# Allegro board Base-ventilator-v1.brd
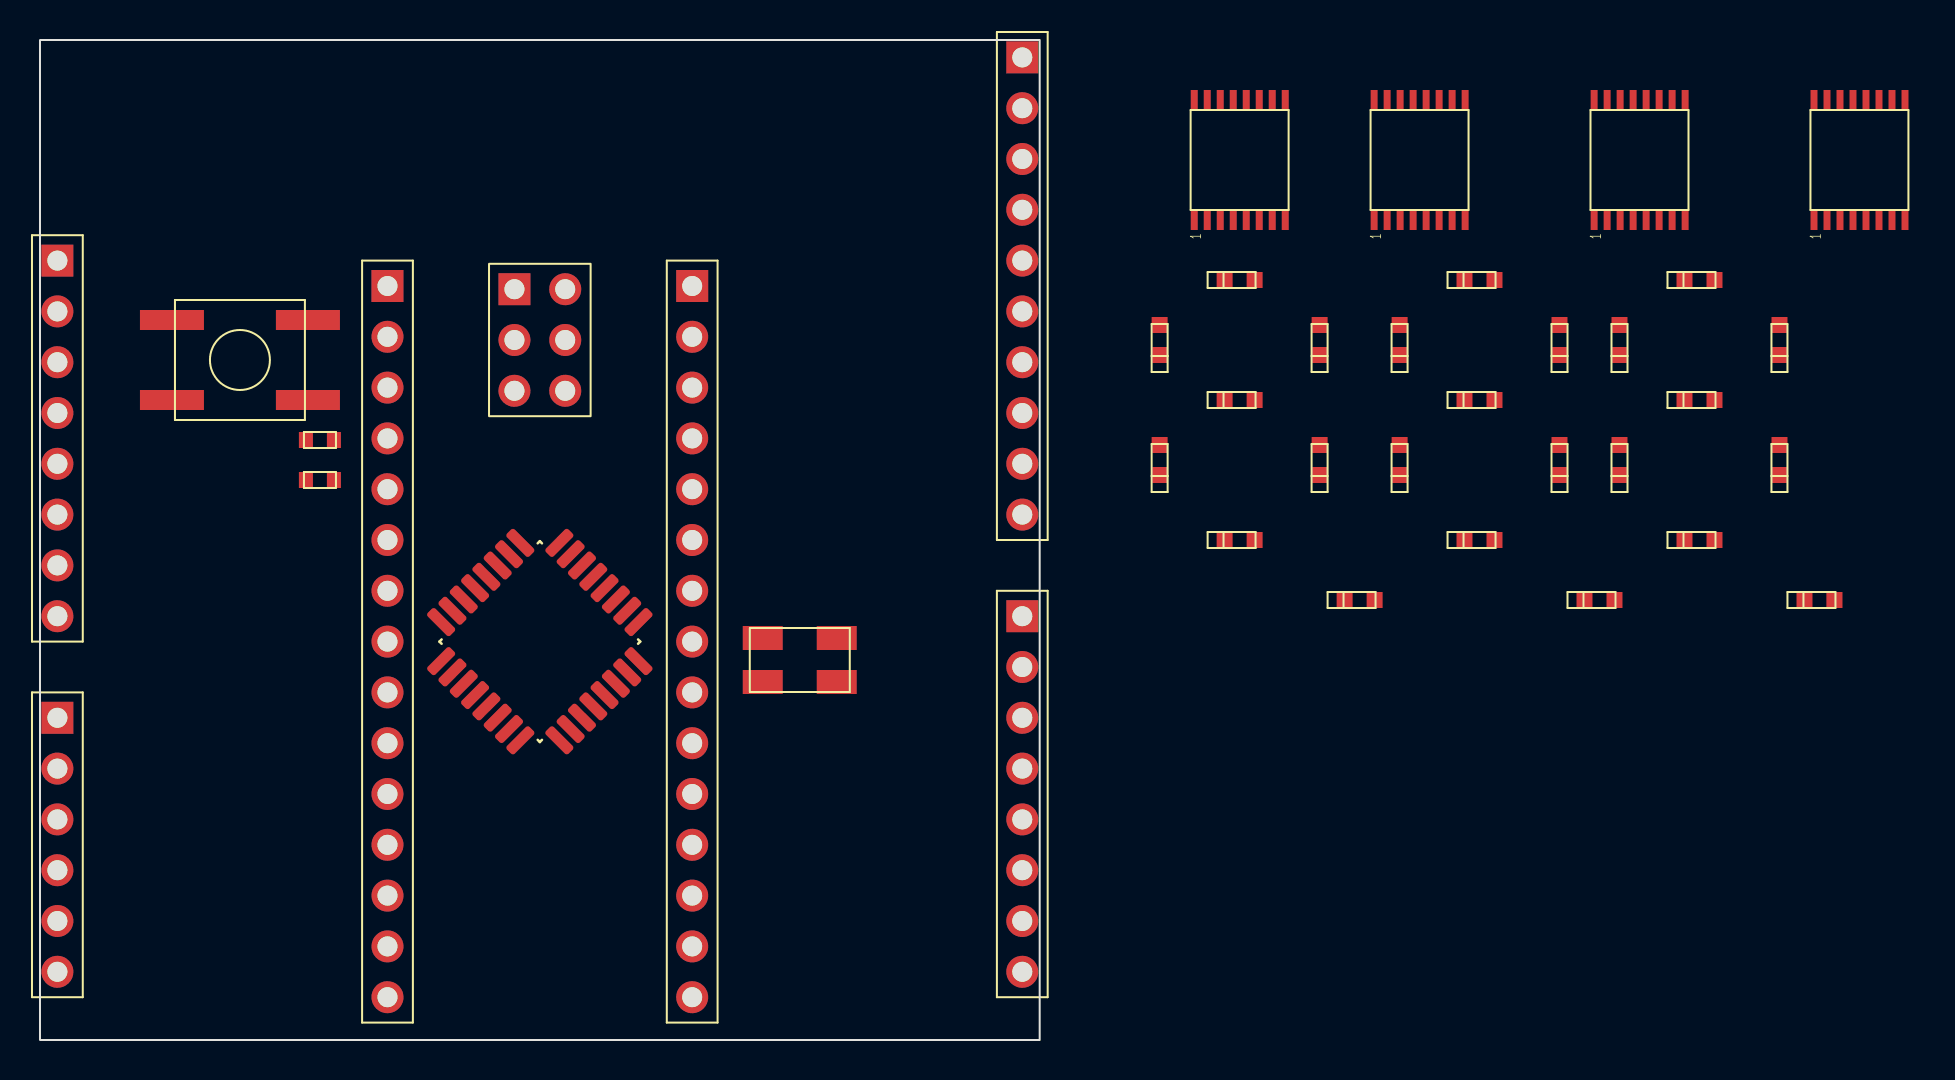
[diagram p0: board, top side]
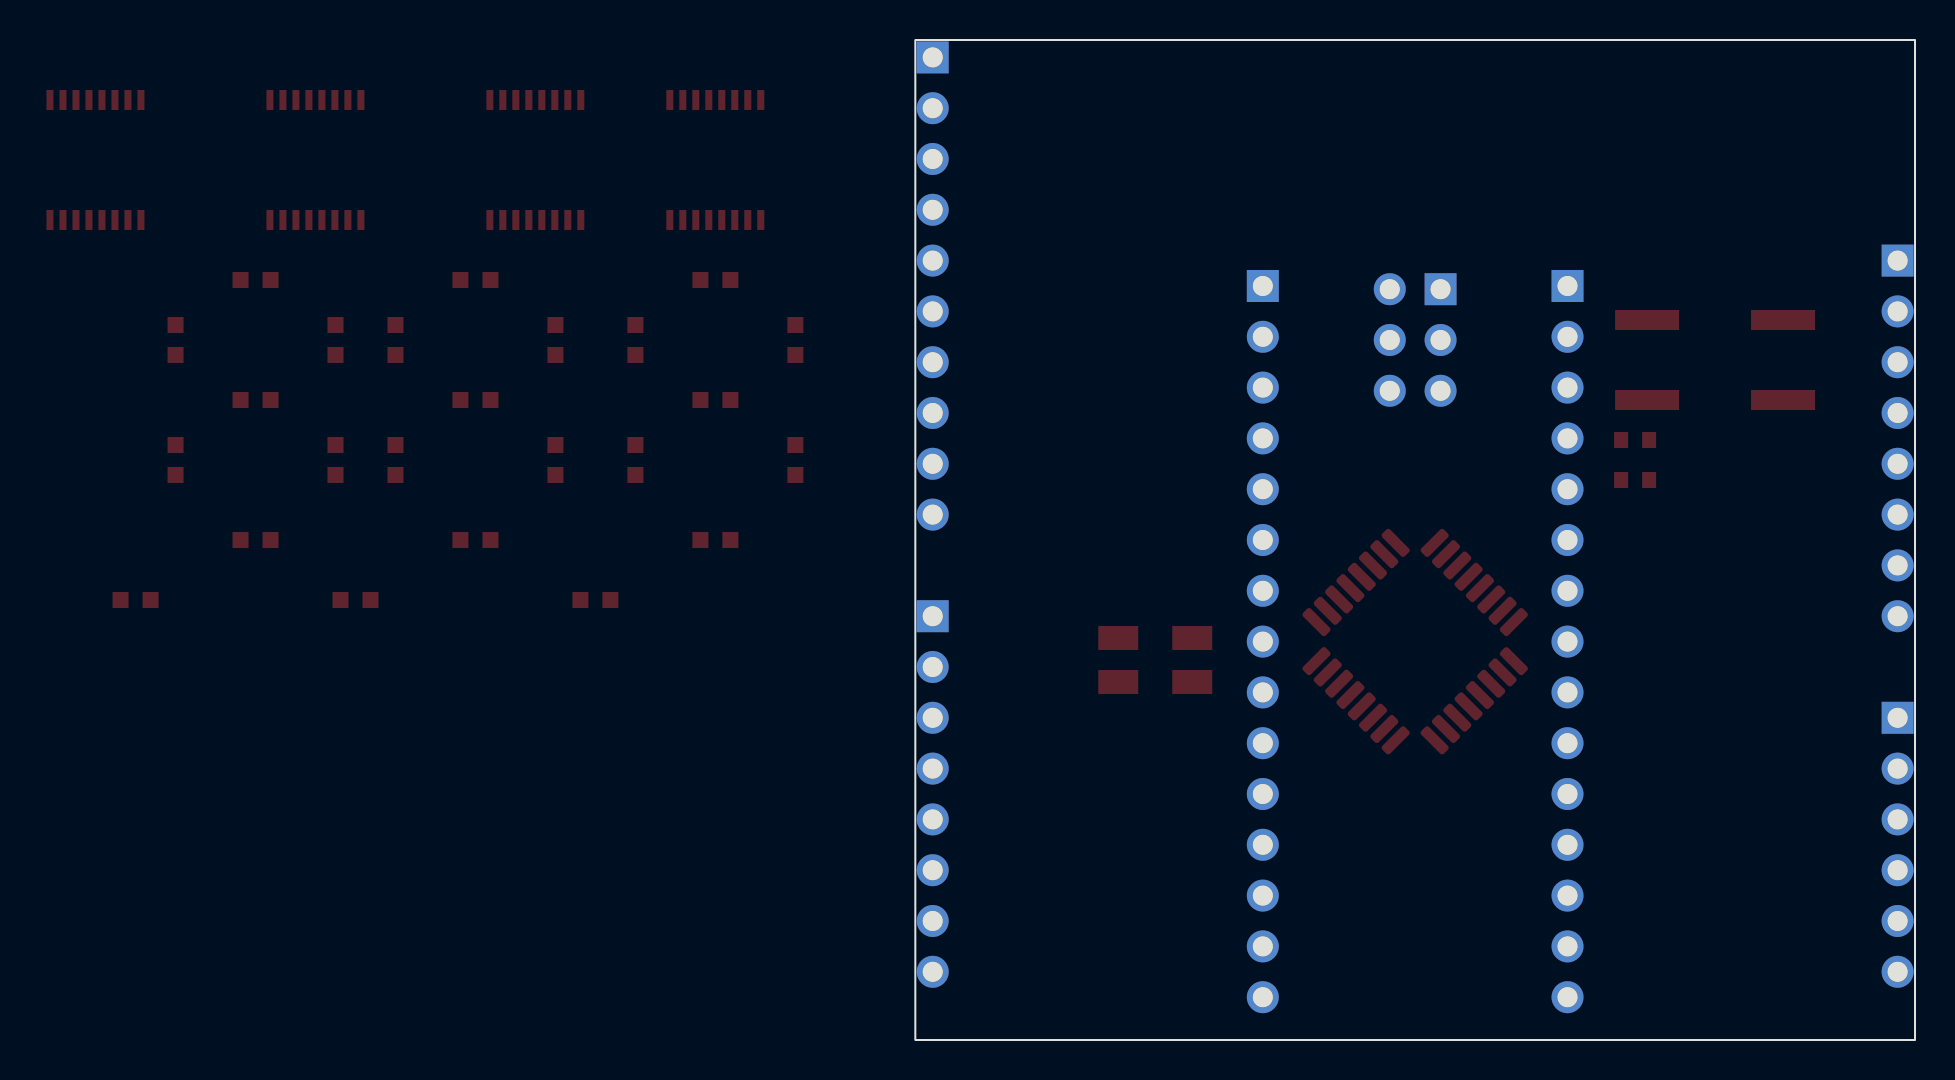
[diagram p1: board, bottom side, seen from below]

Outline 50 x 50 mm; copper layers: TOP, BOTTOM. Coordinates in mm from the lower left corner of the outline.
Outline path: rectangle 0,0 50,50

## Design rules (mm)
constraint set DEFAULT: min track width 0.3

## Placement (name value [footprint] x y rotation side)
C10  0.1uF  [0603M1608]  14 28 0 top
D6  LED GREEN  [LED_0603M1608]  60 38 0 top
D7  LED GREEN  [LED_0603M1608]  64 35 90 top
D10  LED GREEN  [LED_0603M1608]  64 29 90 top
D12  LED GREEN  [LED_0603M1608]  60 25 0 top
D14  LED GREEN  [LED_0603M1608]  56 29 90 top
D16  LED GREEN  [LED_0603M1608]  56 35 90 top
D18  LED GREEN  [LED_0603M1608]  60 32 0 top
D20  LED GREEN  [LED_0603M1608]  66 22 0 top
D22  LED GREEN  [LED_0603M1608]  72 38 0 top
D23  LED GREEN  [LED_0603M1608]  76 35 90 top
D24  LED GREEN  [LED_0603M1608]  76 29 90 top
D25  LED GREEN  [LED_0603M1608]  72 25 0 top
D26  LED GREEN  [LED_0603M1608]  68 29 90 top
D27  LED GREEN  [LED_0603M1608]  68 35 90 top
D28  LED GREEN  [LED_0603M1608]  72 32 0 top
D29  LED GREEN  [LED_0603M1608]  78 22 0 top
D30  LED GREEN  [LED_0603M1608]  83 38 0 top
D31  LED GREEN  [LED_0603M1608]  87 35 90 top
D32  LED GREEN  [LED_0603M1608]  87 29 90 top
D33  LED GREEN  [LED_0603M1608]  83 25 0 top
D34  LED GREEN  [LED_0603M1608]  79 29 90 top
D35  LED GREEN  [LED_0603M1608]  79 35 90 top
D36  LED GREEN  [LED_0603M1608]  83 32 0 top
D37  LED GREEN  [LED_0603M1608]  89 22 0 top
J13  HEADER 15  [HEAD15T25]  17.38 19.92 0 top
J14  HEADER 15  [HEAD15T25]  32.62 19.92 0 top
J15  HEADER 8  [HEAD8T25]  0.87 30.08 0 top
J16  HEADER 10  [HEAD10T25]  49.13 37.7 0 top
J17  HEADER 6  [HEAD6T25]  0.87 9.76 0 top
J18  HEADER 8  [HEAD8T25]  49.13 12.3 0 top
J19  HEADER 3X2  [HEAD2X3T25]  25 35 0 top
R13  10K  [0603M1608]  14 30 0 top
SW1  PB-NO  [BUTTON_EVQQ2]  10 34 270 top
U3  ATMEGA328P-AUR  [QFP80P900X900X120-32N]  25 19.92 135 top
U4  74HC595  [TSSOP16]  60 44 90 top
U5  74HC595  [TSSOP16]  91 44 90 top
U6  74HC595  [TSSOP16]  69 44 90 top
U7  74HC595  [TSSOP16]  80 44 90 top
Y4  16MHz  [CRYSTAL_SMD_50_32]  38 19 90 top

## Library data of the parts
C10 = CAP NP
D6 D7 D10 D12 D14 D16 D18 D20 D22-D37 = LED
J13 J14 = HEADER 15
J15 J18 = HEADER 8
J16 = HEADER 10
J17 = HEADER 6
J19 = HEADER 3X2
R13 = RESISTOR
SW1 = SW_TC_SPST
U3 = ATMEGA328P-AUR
U4-U7 = 74HC595
Y4 = CRYSTAL1-4/SM

## Footprints (pads in the part's own frame, mm; a bottom-side part is the same pattern mirrored in y, then rotated)
0603M1608
  rect 0.7x0.8 smd: 1(-0.7,0) 2(0.7,0)
BUTTON_EVQQ2
  rect 1x3.2 smd: 1(-2,3.4) 2(-2,-3.4) 3(2,-3.4) 4(2,3.4)
CRYSTAL_SMD_50_32
  rect 1.2x2 smd: 1(-1.1,1.85) 2(-1.1,-1.85) 3(1.1,-1.85) 4(1.1,1.85)
HEAD2X3T25
  rect 1.6x1.6 hole 1: 1(-1.27,2.54)
  round 1.6 hole 1: 2(1.27,2.54) 3(-1.27,0) 4(1.27,0) 5(-1.27,-2.54) 6(1.27,-2.54)
HEAD6T25
  rect 1.6x1.6 hole 1: 1(0,6.35)
  round 1.6 hole 1: 2(0,3.81) 3(0,1.27) 4(0,-1.27) 5(0,-3.81) 6(0,-6.35)
HEAD8T25
  rect 1.6x1.6 hole 1: 1(0,8.89)
  round 1.6 hole 1: 2(0,6.35) 3(0,3.81) 4(0,1.27) 5(0,-1.27) 6(0,-3.81) 7(0,-6.35) 8(0,-8.89)
HEAD10T25
  rect 1.6x1.6 hole 1: 1(0,11.43)
  round 1.6 hole 1: 2(0,8.89) 3(0,6.35) 4(0,3.81) 5(0,1.27) 6(0,-1.27) 7(0,-3.81) 8(0,-6.35) 9(0,-8.89) 10(0,-11.43)
HEAD15T25
  rect 1.6x1.6 hole 1: 1(0,17.78)
  round 1.6 hole 1: 2(0,15.24) 3(0,12.7) 4(0,10.16) 5(0,7.62) 6(0,5.08) 7(0,2.54) 8(0,0) 9(0,-2.54) 10(0,-5.08) 11(0,-7.62) 12(0,-10.16) 13(0,-12.7) 14(0,-15.24) 15(0,-17.78)
LED_0603M1608
  rect 0.8x0.8 smd: 1(-0.75,0) 2(0.75,0)
QFP80P900X900X120-32N
  custom 1.6x0.55 smd: 1(-4.18,2.8) 2(-4.18,2) 3(-4.18,1.2) 4(-4.18,0.4) 5(-4.18,-0.4) 6(-4.18,-1.2) 7(-4.18,-2) 8(-4.18,-2.8) 17(4.18,-2.8) 18(4.18,-2) 19(4.18,-1.2) 20(4.18,-0.4) 21(4.18,0.4) 22(4.18,1.2) 23(4.18,2) 24(4.18,2.8)
  custom 0.55x1.6 smd: 9(-2.8,-4.18) 10(-2,-4.18) 11(-1.2,-4.18) 12(-0.4,-4.18) 13(0.4,-4.18) 14(1.2,-4.18) 15(2,-4.18) 16(2.8,-4.18) 25(2.8,4.18) 26(2,4.18) 27(1.2,4.18) 28(0.4,4.18) 29(-0.4,4.18) 30(-1.2,4.18) 31(-2,4.18) 32(-2.8,4.18)
TSSOP16
  rect 1x0.35 smd: 1(-3,2.27) 2(-3,1.62) 3(-3,0.97) 4(-3,0.32) 5(-3,-0.33) 6(-3,-0.98) 7(-3,-1.63) 8(-3,-2.28) 9(3,-2.28) 10(3,-1.63) 11(3,-0.98) 12(3,-0.33) 13(3,0.32) 14(3,0.97) 15(3,1.62) 16(3,2.27)

## Nets
3V: R13.2
3V3: U3.18 U3.20
3V3-AR: J13.2 J15.4
5V: J19.2 U3.4 U3.6(VCC__1) U4.10 U4.16(VCC) U5.10 U5.16(VCC) U6.10 U6.16(VCC) U7.10 U7.16(VCC)
5V-AR: J13.12 J15.5
GND_POWER: C10.2 J13.14 J14.12 J15.6 J15.7 J16.4 J19.6 SW1.1 SW1.2 U3.3 U3.5 U3.21 U4.8 U4.13 U5.8 U5.13 U6.8 U6.13 U7.8 U7.13 Y4.2 Y4.3
VIN: J13.15 J15.8
/RESET_PC6: J14.13
A0_PC0_D14: J13.4 J17.1 U3.23
A1_PC1_D15: J13.5 J17.2 U3.24
A2_PC2_D16: J13.6 J17.3 U3.25
A3_PC3_D17: J13.7 J17.4 U3.26
A4_PC4_D18_SDA: J13.8 J17.5 U3.27
A5_PC5_D19_SCL: J13.9 J17.6 U3.28
A6_D20: J13.10 U3.19
A7_D21: J13.11 U3.22
AREF: J13.3 J16.3
D2_PD2: J14.11 J18.6 U3.32
D3_PD3: J14.10 J18.5
D3_PD4: U3.1
D4_PD4_T0: J14.9 J18.4
D4_PD4_T1: U3.2
D5_PD5_T1: J14.8 J18.3 U3.9
D6_PD6: J14.7 J18.2 U3.10
D7_PD7: J14.6 J18.1 U3.11
D8_PB0: J14.5 J16.10 U3.12 U4.12 U5.12 U6.12 U7.12
D9_PB1: J14.4 J16.9 U3.13
D10_PB2_SS: J14.3 J16.8 U3.14
D11_PB3_MOSI: J14.2 J16.7 J19.4 U3.15 U4.14
D12_PB4_MISO: J14.1 J16.6 J19.1 U3.16
D18_PC4_SDA: J16.2
D18_PC5_SCL: J16.1
IOREF: J15.2
PB5_D13_SCK: J13.1 J16.5 J19.3 U3.17 U4.11 U5.11 U6.11 U7.11
PC6_RESET: C10.1 J13.13 J15.3 J19.5 R13.1 SW1.3 SW1.4 U3.29
RX_PD1: J14.14 J18.7 U3.31
SHIFT_1-2: U4.9 U6.14
SHIFT_2-3: U6.9 U7.14
SHIFT_3-4: U5.14 U7.9
TX_PD0: J14.15 J18.8 U3.30
N814199: D6.2 U4.15
N814203: D7.2 U4.1
N814221: D10.2 U4.2
N814233: D12.2 U4.3
N814245: D14.2 U4.4
N814257: D16.2 U4.5
N814269: D18.2 U4.6
N814333: D20.2 U4.7
N814340: D20.1(CATHODE)
N814344: D18.1(CATHODE)
N814348: D16.1(CATHODE)
N814352: D14.1(CATHODE)
N814356: D12.1(CATHODE)
N814360: D10.1(CATHODE)
N814364: D7.1(CATHODE)
N814368: D6.1(CATHODE)
N819814: D22.2 U6.15
N819818: D22.1(CATHODE)
N819830: D23.2 U6.1
N819846: D24.2 U6.2
N819890: D25.2 U6.3
N819902: D23.1(CATHODE)
N819918: D26.2 U6.4
N819926: D27.2 U6.5
N819970: D28.2 U6.6
N819982: D24.1(CATHODE)
N819994: D29.2 U6.7
N820038: D25.1(CATHODE)
N820090: D26.1(CATHODE)
N820138: D27.1(CATHODE)
N820186: D28.1(CATHODE)
N820234: D29.1(CATHODE)
N821046: D30.2 U7.15
N821050: D30.1(CATHODE)
N821062: D31.2 U7.1
N821078: D32.2 U7.2
N821122: D33.2 U7.3
N821134: D31.1(CATHODE)
N821150: D34.2 U7.4
N821158: D35.2 U7.5
N821202: D36.2 U7.6
N821214: D32.1(CATHODE)
N821226: D37.2 U7.7
N821270: D33.1(CATHODE)
N821322: D34.1(CATHODE)
N821370: D35.1(CATHODE)
N821418: D36.1(CATHODE)
N821466: D37.1(CATHODE)
N822314: U5.15
N822330: U5.1
N822346: U5.2
N822390: U5.3
N822418: U5.4
N822426: U5.5
N822470: U5.6
N822494: U5.7
N827100: U3.7 Y4.1
N827118: U3.8 Y4.4

Pads without a net: J15 1; U5 9
